# Altium PCB WiirdFlex Top.PcbDoc
Units mm, origin at the board's own origin, x right, y up, seen from the top; angles counter-clockwise.
Board outline 74.45 x 75.37 mm, 2 copper layers (Top Layer, Bottom Layer), stack 0.143 mm thick; 13 components, 23 nets, 114 pads, 92 vias.
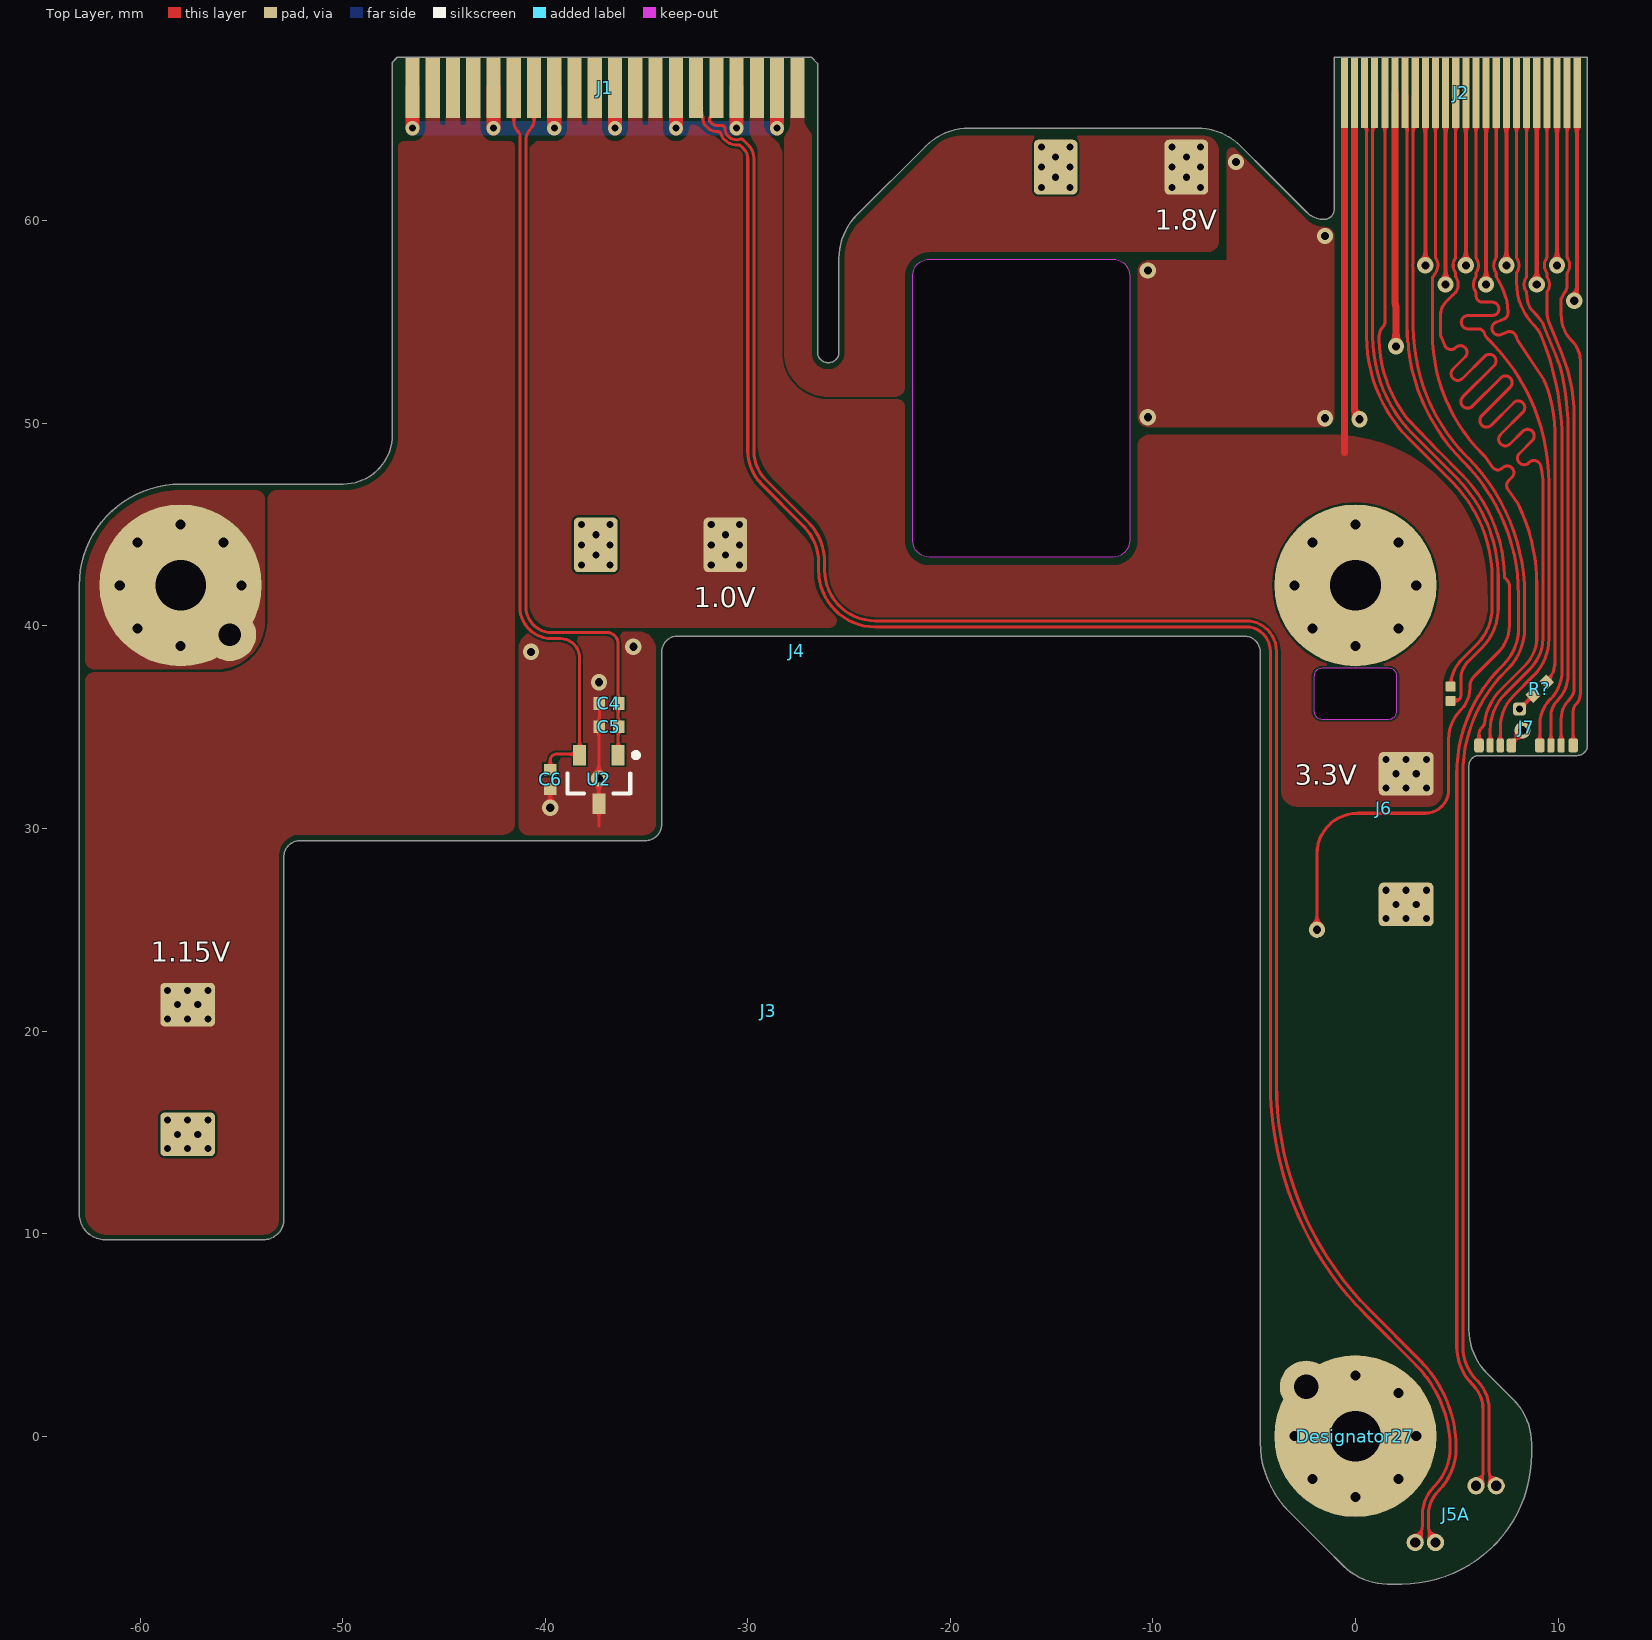
[diagram p0: Top Layer view]
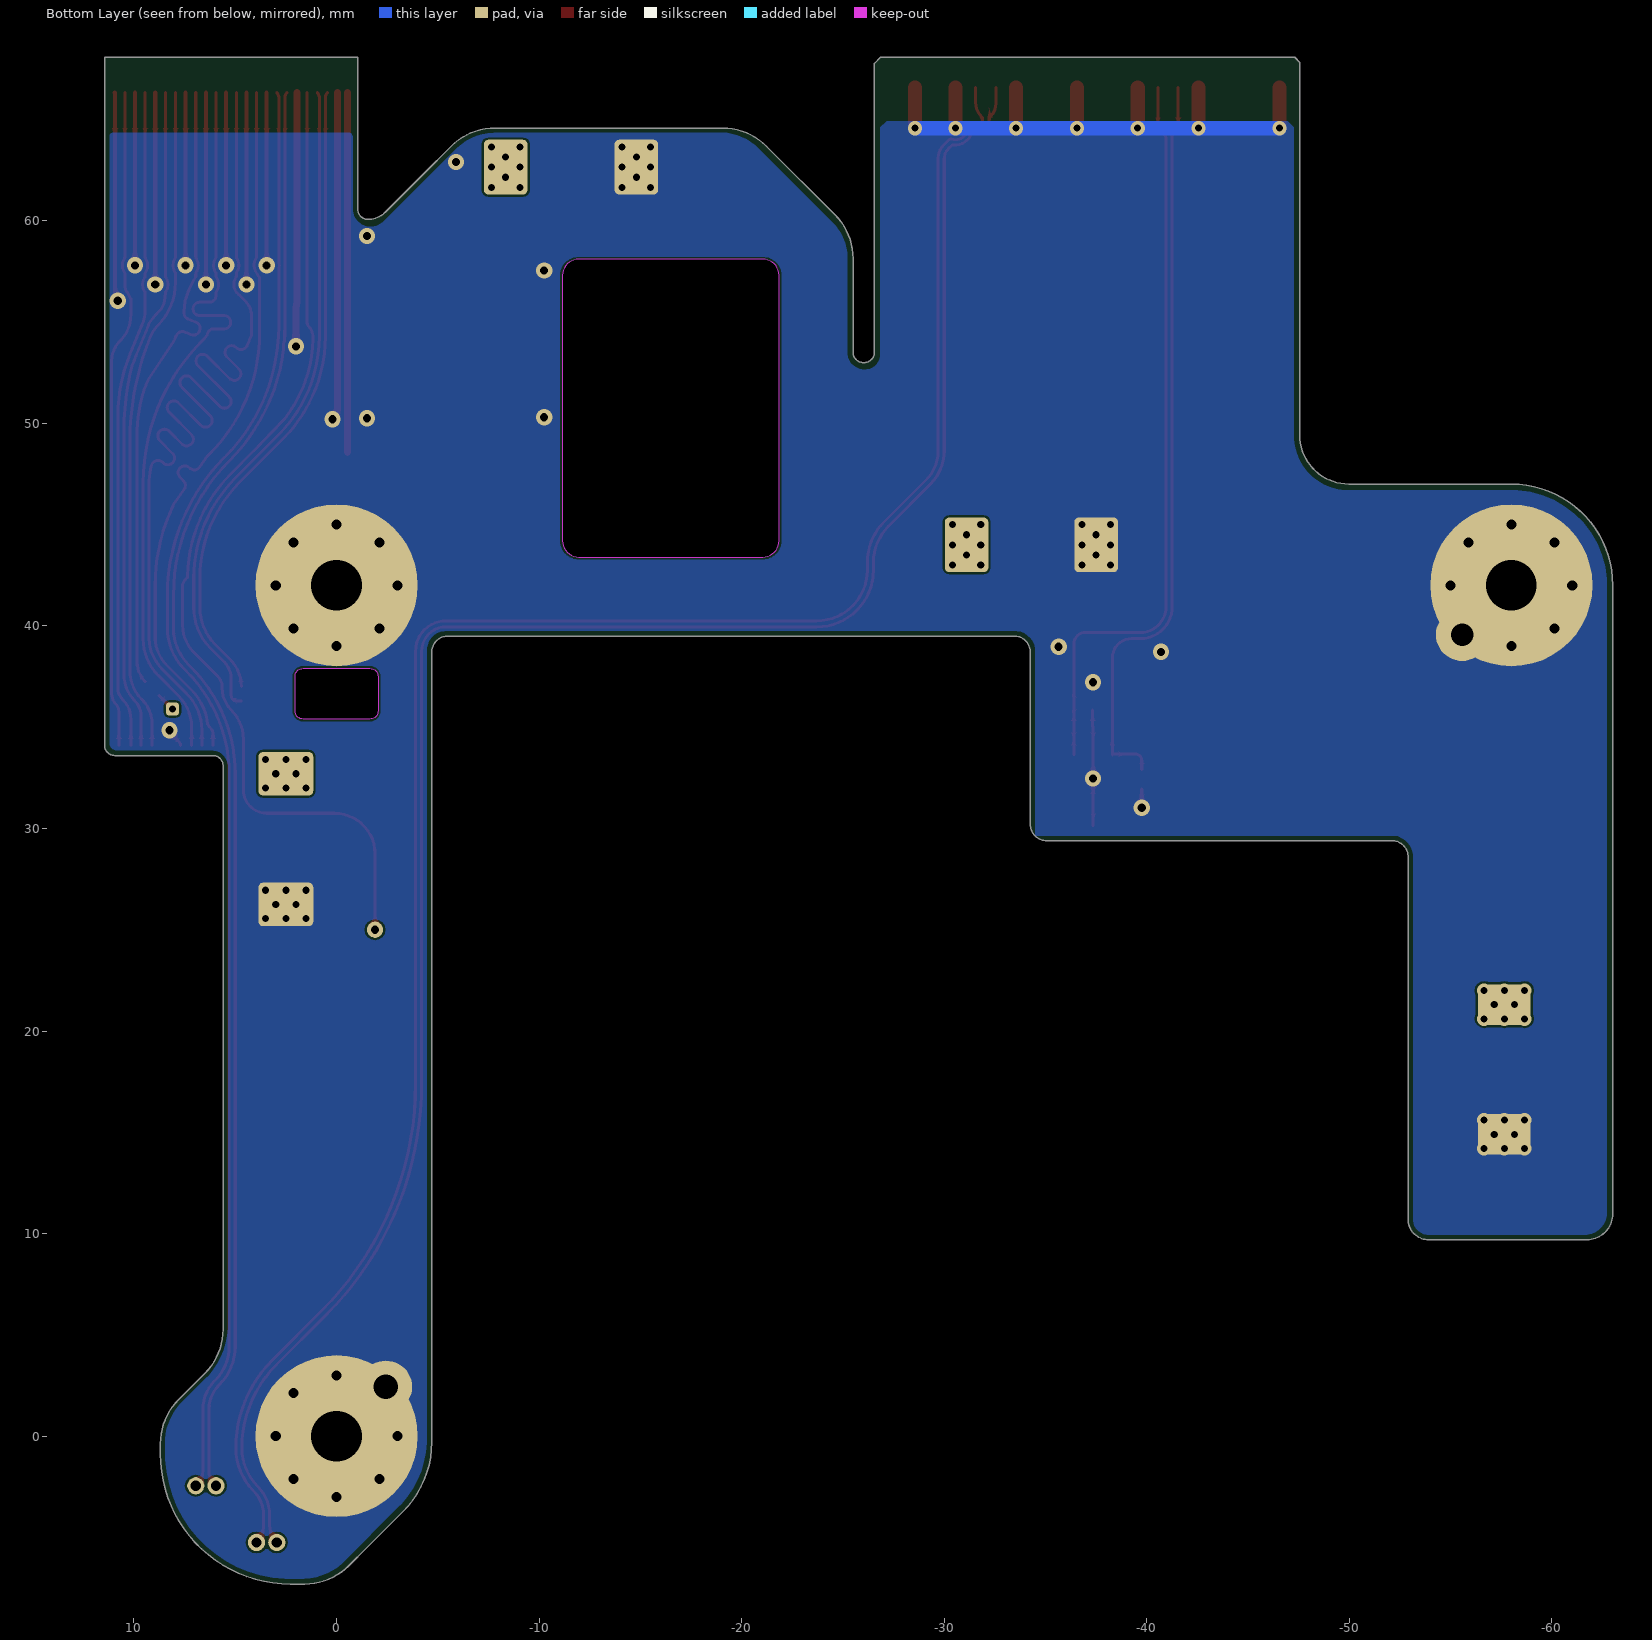
[diagram p1: Bottom Layer view, seen from below]

## Layer stack, top to bottom
Top Coverlay: solder mask 0.0275, SM-001, Dk 4.2
Top Layer: signal copper 0.0525
Dielectric 2: prepreg 0.013, Adhesive, Dk 4.1
Dielectric 1: core 0.0125, Polyimide, Dk 3.2
Dielectric 3: prepreg 0.013, Adhesive, Dk 4.1
Bottom Layer: signal copper 0.0525
Bottom Coverlay: solder mask 0.0275, SM-001, Dk 4.2

## Board outline
-61.73,9.7 cw(c-61.73,10.97) -63,10.97 -63,42 cw(c-58,42) -58,47 -49.975,47 ccw(c-49.975,49.425) -47.55,49.425 -47.55,67.8 -47.55,67.82 -47.3,68.07 -26.85,68.07 -26.55,67.77 -26.55,53.5 ccw(c-26.05,53.5) -26.05,53 -26,53 ccw(c-26,53.5) -25.5,53.5 -25.5,58.13 cw(c-22.434,58.13) -24.602,60.298 -21.228,63.672 cw(c-19.06,61.504) -19.06,64.57 -7.82,64.57 cw(c-7.82,61.504) -5.652,63.672 -4.3,62.32 -2.404,60.424 ccw(c-1.55,61.277) -1.55,60.07 ccw(c-1.55,60.57) -1.05,60.57 -1.05,68.07 11.45,68.07 11.45,34.1 cw(c10.95,34.1) 10.95,33.6 6.1,33.6 ccw(c6.1,33.1) 5.6,33.1 5.6,5.27 ccw(c8.666,5.27) 6.498,3.102 7.802,1.798 cw(c5.634,-0.37) 8.7,-0.37 8.7,-0.875 cw(c2.275,-0.875) 2.275,-7.3 1.57,-7.3 cw(c1.57,-4.234) -0.598,-6.402 -1.502,-5.498 -3.277,-3.723 cw(c0.158,-0.288) -4.7,-0.288 -4.7,38.7 ccw(c-5.5,38.7) -5.5,39.5 -33.45,39.5 ccw(c-33.45,38.7) -34.25,38.7 -34.25,30.2 cw(c-35.05,30.2) -35.05,29.4 -52.1,29.4 ccw(c-52.1,28.6) -52.9,28.6 -52.9,10.7 cw(c-53.9,10.7) -53.9,9.7
cut-out: 1.65,37.9 -1.65,37.9 ccw(c-1.65,37.5) -2.05,37.5 -2.05,35.8 ccw(c-1.65,35.8) -1.65,35.4 1.65,35.4 ccw(c1.65,35.8) 2.05,35.8 2.05,37.5 ccw(c1.65,37.5)
cut-out: -21.05,58.1 -11.95,58.1 cw(c-11.95,57.3) -11.15,57.3 -11.15,44.2 cw(c-11.95,44.2) -11.95,43.4 -21.05,43.4 cw(c-21.05,44.2) -21.85,44.2 -21.85,57.3 cw(c-21.05,57.3)

## Design rules (kind name [scope] priority, off if disabled: settings)
Clearance [All] p1: gap=0.1 ignorepadtopadclearanceinfootprint=FALSE
DiffPairsRouting DiffPairsRouting_USB1 [InDifferentialPairClass('USB')] p1: maxlimit=0.254 minlimit=0.101 mostfreqgap=0.15 toplayer_minwidth=0.06 toplayer_maxwidth=0.381 toplayer_prefwidth=0.15 bottomlayer_minwidth=0.06 bottomlayer_maxwidth=0.381 bottomlayer_prefwidth=0.15 impedanceprofiledriven=TRUE impedanceprofileid={1371FDB5-D5BD-4BD9-98B9-99D2D47B4C02} impedanceprofilevalue=90.000000 maxuncoupledlength=12.7
DiffPairsRouting [All] p2: maxlimit=0.254 minlimit=0.254 mostfreqgap=0.254 toplayer_minwidth=0.381 toplayer_maxwidth=0.381 toplayer_prefwidth=0.381 bottomlayer_minwidth=0.381 bottomlayer_maxwidth=0.381 bottomlayer_prefwidth=0.381 maxuncoupledlength=12.7
PolygonConnect [All] p1: connectstyle=Direct reliefconductorwidth=0.254 reliefentries=4 polygonreliefangle="90 Angle" airgapwidth=0.254
RoutingVias [All] p1: holewidth=0.4 width=0.8 viastyle="Through Hole" minholewidth=0.4 minwidth=0.8 maxholewidth=0.711 maxwidth=1.27
SolderMaskExpansion TentedVias [IsVia] p1: expansion=0.102 istentingtop=TRUE
SolderMaskExpansion [All] p2: expansion=0.102 istentingtop=FALSE
Width [All] p1: maxlimit=10 minlimit=0.15 preferedwidth=0.15
29 further rules are at their usual default settings.

## Classes and differential pairs
component class TempSense: C4 C5 C6 U2
differential pair class USB: USB_BT USB_D1 USB_D2
component class "WiirdFlex Top": J1 J2 J3 J4 J5A J6 J7 R?
differential pair USB_D2: +USB_D2_P -USB_D2_N
differential pair USB_BT: +USB_BT_P -USB_BT_N
differential pair USB_D1: +USB_D1_P -USB_D1_N

## Components (designator, comment, footprint, x,y, rotation, side; value= is the part's Value field where it differs from the comment)
C4 "Capacitor" CAPC1005X06N -36.85,36.17 r0 top value=1uF
C5 "Capacitor" CAPC1005X06N -36.85,35.02 r0 top value=0.1uF
C6 "Capacitor" CAPC1005X06N -39.75,32.42 r90 top value=0.1uF
Designator27 "Comment" "Wii Trim: LMAO with extra mounting hole" 0,0 r0 top locked
J1 "WiirdFlex Power and USB" "2-1734248-0 FPC tab" -37.05,68.07 r0 top
J2 "WiirdFlex Top Extra Signals" "FH12A-24S-0.5SH(55) FPC TAB" -1.05,66.32 r0 top
J3 "RVK-1_Ground_MountingScrews" "RVK-1_GND_SCREWS - LMAO WITH EXTRA SCREWPOST" 0,0 r0 top locked
J4 "RVK-1_Power_Rails" RVK-1_Power_Rails_Top_Direct 0,0 r0 top locked
J5A "RVK-1_USB_Both" RVK-1_USB_TOP 0,0 r0 top locked
J6 "RVK-01_Bluetooth_Data" RVK-1_BT_DATA 0,0 r0 top locked
J7 "RVK-1_SD_Bus" RVK-1_SD_RPADS_TOP_FLEX 0,0 r0 top locked
R? "Resistor" RESC1005X04N 9.108,36.908 r225 top value=30?
U2 "MCP9700T-E/TT" SOT95P237X112-3N -37.35,32.42 r270 top

## Footprints (in the part's own frame and the unit in brackets; to place one, negate y for a bottom-side part, rotate by r counter-clockwise, add the part's x,y. Pads: shape width x height; smd on the part's side, far side on the other; paste and mask are expansions set on the pad)
"2-1734248-0 FPC tab" [mm] "FPC tab to mate with TE Connectivity 2-1734248-0"
  rect 0.7x3 smd: 1(9.5,-1.5) 2(8.5,-1.5) 3(7.5,-1.5) 4(6.5,-1.5) 5(5.5,-1.5) 6(4.5,-1.5) 7(3.5,-1.5) 8(2.5,-1.5) 9(1.5,-1.5) 10(0.5,-1.5) 11(-0.5,-1.5) 12(-1.5,-1.5) 13(-2.5,-1.5) 14(-3.5,-1.5) 15(-4.5,-1.5) 16(-5.5,-1.5) 17(-6.5,-1.5) 18(-7.5,-1.5) 19(-8.5,-1.5) 20(-9.5,-1.5)
CAPC1005X06N [mm] "Chip Capacitor, 2-Leads, Body 1.00x0.50mm, IPC Medium Density"
  rect 0.58x0.62 smd: 1(-0.48,0) 2(0.48,0)
  body extent -0.52,-0.27 0.53,0.28, height 0.55
"FH12A-24S-0.5SH(55) FPC TAB" [mm]
  rect 0.35x3.5 smd mask+0: 1(0.5,0) 2(1,0) 3(1.5,0) 4(2,0) 5(2.5,0) 6(3,0) 7(3.5,0) 8(4,0) 9(4.5,0) 10(5,0) 11(5.5,0) 12(6,0) 13(6.5,0) 14(7,0) 15(7.5,0) 16(8,0) 17(8.5,0) 18(9,0) 19(9.5,0) 20(10,0) 21(10.5,0) 22(11,0) 23(11.5,0) 24(12,0)
RESC1005X04N [mm] "Chip Resistor, 2-Leads, Body 1.00x0.50mm, IPC Medium Density"
  rect 0.5x0.55 smd: 1(-0.475,0) 2(0.475,0)
  body extent -0.52,-0.27 0.53,0.28, height 0.4
RVK-1_BT_DATA [mm]
  rrect20% 0.5x0.5 smd: 1(4.7,36.3) 2(4.7,37)
  round 0.8 hole 0.4: 3(-1.9,25)
"RVK-1_GND_SCREWS - LMAO WITH EXTRA SCREWPOST" [mm]
  round 1 hole 0.5: 1(-61,42) 1(-60.121,39.879) 1(-60.121,44.121) 1(-58,39) 1(-58,45) 1(-55.879,44.121) 1(-55,42) 1(-3,0) 1(-3,42) 1(-2.121,-2.121) 1(-2.121,39.879) 1(-2.121,44.121) 1(0,-3) 1(0,3) 1(0,39) 1(0,45) 1(2.121,-2.121) 1(2.121,2.121) 1(2.121,39.879) 1(2.121,44.121) 1(3,0) 1(3,42)
  round 8 hole 2.5: 1(-58,42) 1(0,0) 1(0,42)
  round 2.6 hole 1.1: 1(-55.568,39.568)
  round 2.6 hole 1.2: 1(-2.432,2.432)
RVK-1_Power_Rails_Top_Direct [mm] "Direct solder-to-board attachment options for Wii power rails.  Includes pads to attach to the Wii in place of existing bulk capacitors (those capacitors would then be relocated to the interface board"
  rrect50% 2.6x2 smd far side: 1(-57.65,14.9) 3(-57.65,21.3)
  rrect20% 2.7x2.15 smd: 1(-57.65,14.9) 1(2.5,26.25) 3(-57.65,21.3) 5(2.5,32.7)
  rrect20% 2.15x2.7 smd far side: 1(-37.5,44) 1(-14.8,62.65) 2(-31.1,44) 4(-8.35,62.65)
  rrect20% 2.15x2.7 smd: 1(-37.5,44) 1(-14.8,62.65) 2(-31.1,44) 4(-8.35,62.65)
  rrect20% 2.7x2.15 smd far side: 1(2.5,26.25) 5(2.5,32.7)
RVK-1_SD_RPADS_TOP_FLEX [mm] "Interface to SD lines as used in top flex"
  rrect50% 0.475x0.7 smd mask-1: 1(6.1,34.1) 5(9.1,34.1) 8(10.75,34.1) 9(7.7,34.1)
  rrect50% 0.35x0.7 smd mask-1: 2(6.65,34.1) 3(7.15,34.1) 6(9.65,34.1) 7(10.15,34.1)
  rrect50% 0.65x0.65 hole 0.35: 4(8.1,35.9)
RVK-1_USB_TOP [mm] "USB vias, the easiest way to access USB from the top side.  This is upstream of ESD protection."
  round 0.85 hole 0.5: 1(3.95,-5.25) 2(2.95,-5.25) 3(5.95,-2.45) 4(6.95,-2.45)
SOT95P237X112-3N [mm] "SOT23, 3-Leads, Body 2.86x2.37mm, Pitch 0.95mm, IPC Medium Density"
  rect 1x0.65 smd: 1(-1.2,0.95) 2(-1.2,-0.95) 3(1.2,0)
  silkscreen extent -1.32,-1.55 0.7,1.95, body extent -0.7,-1.52 0.7,1.53, height 1.12
"Wii Trim: LMAO with extra mounting hole" [mm] "LMAO trim outline, from jefflongo's worklog at https://bitbuilt.net/forums/index.php?threads/wii-pocket.2709/"

## Part data
C4 C5 C6: "General purpose capacitor", Package=0402, Rated Voltage=6.3V
J1: "FPC tab connector for power, main USB, and thermistor/temp sensor"
J2: "FPC tab connector for extra signals: USB, BT, SD"
J4: "Connection points for Wii power rails"
R?: "General purpose resistor", Package=0402
U2: "Low-Power Linear Active Thermistor IC, SOT-23-3 package"

## Via types
v1: diameter 0.7, hole 0.35, Top Layer to Bottom Layer, tented both sides, 71 vias
v2: diameter 0.8, hole 0.4, Top Layer to Bottom Layer, tented both sides, 21 vias

## Nets (pads, with @x,y where several pads share a name; then routed paths per layer and width w, separated by ;. In a path a pad name is that pad's centre, name@x,y a point inside that pad or via, vN(x,y) a via of type N, cw(c..) or ccw(c..) an arc to the next point about the centre after c; other vN are vias at no path point)
1.0V: J1.8 J1.9 J1.11 J1.12 J4.2
  other v1: -31.8,43 -30.4,43 -31.1,43.5 -31.8,44 -30.4,44 -31.1,44.5 -31.8,45 -30.4,45
1.8V: J1.1 J4.4
  other v1: -9.05,61.65 -7.65,61.65 -8.35,62.15 -9.05,62.65 -7.65,62.65 -8.35,63.15 -9.05,63.65 -7.65,63.65
1.15V: J1.17 J1.18 J1.19 J4.3
  other v1: -58.65,20.6 -57.65,20.6 -56.65,20.6 -58.15,21.3 -57.15,21.3 -58.65,22 -57.65,22 -56.65,22
3.3V: J1.3 J2.1 J4.5 | length 17.8
  Top Layer w0.35: -0.55,48.57 J2.1
  other v1: 1.5,32 2.5,32 3.5,32 2,32.7 3,32.7 1.5,33.4 2.5,33.4 3.5,33.4
BT_SENSE: J2.5 J6.3 | length 49.6
  Top Layer w0.15: J6.3 -1.9,28.75 cw(c0.1,28.75) 0.1,30.75 3.45,30.75 ccw(c3.45,31.9) 4.6,31.9 4.6,34.401 cw(c6.649,34.401) 5.2,35.85 ccw(c4.114,36.936) 5.65,36.936 5.65,37 cw(c6.374,37) 5.862,37.512 7.05,38.7 ccw(c5.722,40.028) 7.6,40.028 7.6,41.938 ccw(c7.088,41.938) 7.45,42.3 cw(c8.24,43.09) 7.384,42.372 ; J2.5 1.45,54.991 cw(c1.109,54.991) 1.35,54.75 ccw(c1.775,54.325) 1.174,54.325 1.174,54.163 ccw(c7.612,54.222) 2.588,50.195 4.118,48.606 ccw(c4.226,48.71) 4.12,48.604 5.203,47.521 cw(c0.024,42.34) 6.877,44.929 6.878,44.927 cw(c0.224,42.377) 7.349,42.467 ccw(c7.499,42.468) 7.384,42.373
GND: C4.1 C5.1 C6.1 J1.2 J1.4 J1.7 J1.10 J1.13 J1.16 J1.20 J2.2 J2.6 J2.9 J2.11 J2.13 J2.15 J2.17 J2.20 J2.22 J2.24 J3.1 J4.1 J7.9 U2.3 | length 141.1
  Top Layer w0.15: v2(-39.75,31.02) C6.1 ; -37.35,30.12 U2.3 v2(-37.35,32.47) -37.35,35 C5.1 -37.33,35.851 ; J7.9 cw(c7.941,34.1) 7.771,34.271 8.25,34.75 v2(8.25,34.85)
  Top Layer w0.2: v2(3.45,57.8) J2.9 ; v2(4.45,56.85) J2.11 ; v2(5.45,57.8) J2.13 ; v2(6.45,56.85) J2.15 ; v2(7.45,57.8) J2.17 ; v2(8.95,56.85) J2.20 ; v2(9.95,57.8) J2.22 ; v2(10.8,56.05) ccw(c10.612,56.117) 10.812,56.118 10.812,56.147 cw(c11.012,56.147) 10.817,56.195 10.829,56.242 10.926,56.637 ccw(c10.732,56.686) 10.932,56.687 10.932,66.238 cw(c11.132,66.238) 10.946,66.31 J2.24
  Top Layer w0.35: J2.2 -0.05,50.804 ccw(c0.804,50.804) v2(0.2,50.2) ; J2.6 1.95,56.152 1.95,56.022 1.95,56.02 ccw(c2.3,56.022) 1.955,55.965 1.995,55.719 cw(c1.65,55.661) 2,55.661 v2(2,53.8)
  Top Layer w0.7: v1(-46.55,64.57) J1.20 ; v1(-42.55,64.57) J1.16 ; v1(-39.55,64.57) J1.13 ; v1(-36.55,64.57) J1.10 ; v1(-33.55,64.57) J1.7 ; v1(-30.55,64.57) J1.4 ; v1(-28.55,64.57) J1.2
  Bottom Layer w0.7: v1(-46.55,64.57) v1(-42.55,64.57) v1(-39.55,64.57) v1(-36.55,64.57) v1(-33.55,64.57) v1(-30.55,64.57) v1(-28.55,64.57)
  other v1: -58.65,14.2 -57.65,14.2 -56.65,14.2 -58.15,14.9 -57.15,14.9 -58.65,15.6 -57.65,15.6 -56.65,15.6 1.5,25.55 2.5,25.55 3.5,25.55 2,26.25 3,26.25 1.5,26.95 2.5,26.95 3.5,26.95 -38.2,43 -36.8,43 -37.5,43.5 -38.2,44 -36.8,44 -37.5,44.5 -38.2,45 -36.8,45 -15.5,61.65 -14.1,61.65 -14.8,62.15 -15.5,62.65 -14.1,62.65 -14.8,63.15 -15.5,63.65 -14.1,63.65
  other v2: -37.35,37.22 -40.7,38.72 -35.65,38.97 -1.5,50.25 -10.25,50.3 -10.25,57.55 -1.5,59.25 -5.9,62.9
SD_CD: J2.19 J7.6 | length 33
  Top Layer w0.15: J2.19 8.45,57.273 cw(c8.3,57.272) 8.426,57.19 ccw(c8.95,56.85) 8.426,56.51 cw(c8.3,56.428) 8.45,56.427 ccw(c10.051,56.427) 8.63,55.69 ccw(c8.763,55.759) 8.632,55.686 8.638,55.675 ccw(c9.873,56.668) 8.75,55.55 cw(c5.825,52.63) 9.252,54.94 ccw(c11.433,55.616) 9.321,54.75 9.913,53.31 cw(c2.693,50.339) 10.091,52.831 10.093,52.826 cw(c-2.126,49.645) 10.5,49.649 10.5,49.647 10.5,37.609 cw(c8.642,37.609) 9.956,36.295 cw(c8.151,37.799) 9.839,36.166 ccw(c9.947,36.061) 9.823,36.146 ccw(c10.674,35.576) 9.65,35.576 J7.6
SD_CLK: J2.16 R?.1 | length 31.4
  Top Layer w0.15: J2.16 6.95,58.223 cw(c6.8,58.222) 6.926,58.14 ccw(c7.45,57.8) 6.902,57.5 ccw(c7.45,57.8) 6.926,57.46 cw(c6.8,57.378) 6.95,57.377 6.95,57.272 ccw(c7.1,57.272) 6.974,57.19 cw(c3.836,55.153) 7.34,56.465 cw(c3.836,55.153) 7.341,56.462 cw(c3.836,55.153) 7.436,56.172 cw(c3.836,55.153) 7.456,56.099 7.472,56.037 7.537,55.498 cw(c7.21,55.459) 7.336,55.155 6.94,54.99 ccw(c7.066,54.686) 6.762,54.56 ccw(c7.066,54.686) 7.192,54.383 7.487,54.505 cw(c7.613,54.201) 7.917,54.325 8.015,54.085 9.314,52.128 9.315,52.126 9.399,51.915 cw(c2.812,49.435) 9.425,51.844 cw(c2.812,49.435) 9.471,51.713 cw(c2.812,49.435) 9.848,49.6 cw(c2.812,49.435) 9.85,49.436 9.85,49.435 9.85,38.225 cw(c8.462,38.225) R?.1
SD_CLK_UNTERM: J7.4 R?.2 | length 0.9
  Top Layer w0.15: J7.4 R?.2
SD_CMD: J2.10 J7.1 | length 35.6
  Top Layer w0.15: 3.8,54.456 ccw(c12.265,54.456) 6.277,48.473 6.279,48.471 cw(c-0.167,42.023) 6.376,48.372 cw(c-0.167,42.023) 6.428,48.318 6.758,47.844 ccw(c7.028,48.031) 7.261,47.799 cw(c7.494,47.566) 7.726,47.799 cw(c7.494,47.566) 7.726,47.333 7.559,47.166 ccw(c7.791,46.933) 7.521,46.746 8.032,46.011 cw(c-0.167,42.023) 8.066,45.939 cw(c-0.167,42.023) 8.68,44.227 cw(c-0.167,42.023) 8.95,42.025 8.95,42.023 8.95,39.352 cw(c7.01,39.352) 8.918,39.002 cw(c6.76,39.602) 8.344,38.018 7.183,36.857 ccw(c9.19,34.848) 6.427,35.505 ccw(c9.19,34.848) 6.37,35.186 cw(c6.221,35.204) 6.349,35.125 cw(c5.767,35.483) 6.25,35 ccw(c6.612,34.638) 6.1,34.638 J7.1 ; 3.8,54.458 3.8,57.2 ccw(c3.438,57.562) 3.911,57.367 cw(c4.05,57.309) 3.934,57.404 ccw(c3.45,57.8) 3.974,58.14 cw(c4.1,58.222) 3.95,58.222 J2.10
SD_DAT0: J2.23 J7.8 | length 32.7
  Top Layer w0.15: 10.45,57.378 10.45,56.874 cw(c9.426,56.874) 10.399,56.556 cw(c10.257,56.603) 10.362,56.496 ccw(c10.8,56.05) 10.2,56.227 cw(c10.057,56.269) 10.164,56.165 cw(c9.426,56.874) 10.15,56.15 10.15,55.378 ccw(c12.028,55.378) 10.7,54.05 cw(c9.734,53.084) 11.1,53.084 11.1,36.633 cw(c10.417,36.633) 10.9,36.15 ccw(c11.262,35.788) 10.75,35.788 J7.8 ; 10.45,57.378 cw(c10.6,57.378) 10.474,57.46 ccw(c9.95,57.8) 10.474,58.14 cw(c10.6,58.222) 10.45,58.222 J2.23
SD_DAT1: J2.21 J7.7 | length 32.7
  Top Layer w0.15: 9.45,55.616 ccw(c11.433,55.616) 9.599,54.862 10.191,53.422 cw(c2.693,50.339) 10.8,50.342 10.8,50.34 10.8,36.954 cw(c9.946,36.954) 10.55,36.35 ccw(c11.516,35.384) 10.15,35.384 ; 9.45,55.617 9.45,56.428 cw(c9.6,56.428) 9.474,56.51 ccw(c8.95,56.85) 9.474,57.19 cw(c9.6,57.272) 9.45,57.272 9.45,57.377 ccw(c9.3,57.378) 9.426,57.46 cw(c9.95,57.8) 9.426,58.14 ccw(c9.3,58.222) 9.45,58.223 J2.21 ; J7.7 10.15,35.383
SD_DAT2: J2.14 J7.3 | length 37.3
  Top Layer w0.15: J2.14 5.95,58.222 ccw(c6.1,58.222) 5.974,58.14 cw(c5.45,57.8) 5.974,57.46 ccw(c6.1,57.378) 5.95,57.378 5.95,57.273 cw(c5.8,57.272) 5.926,57.19 ccw(c6.45,56.85) 5.838,56.723 ccw(c6.45,56.85) 5.859,56.648 5.926,56.51 5.95,56.427 5.95,56.307 ccw(c6.279,56.307) 6.279,55.978 6.757,55.978 cw(c6.757,55.649) 7.086,55.649 cw(c6.757,55.649) 6.757,55.32 5.552,55.32 ccw(c5.552,54.991) 5.223,54.991 ccw(c5.552,54.991) 5.552,54.662 6.062,54.662 cw(c6.062,54.333) 6.375,54.435 6.408,54.333 ccw(c8.348,55.743) 6.465,54.258 ccw(c8.348,55.743) 6.652,54.048 cw(c-0.347,47.05) 6.897,53.794 cw(c-0.347,47.05) 7.524,53.05 cw(c-0.347,47.05) 7.529,53.044 cw(c-0.347,47.05) 7.807,52.66 cw(c-0.347,47.05) 9.55,47.052 9.55,47.05 9.55,39.352 cw(c7.01,39.352) 8.806,37.556 7.8,36.55 ccw(c9.369,34.981) 7.15,34.981 J7.3
SD_DAT3: J2.12 J7.2 | length 52.7
  Top Layer w0.15: J2.12 4.95,58.223 cw(c4.8,58.222) 4.926,58.14 ccw(c5.45,57.8) 4.926,57.46 cw(c4.8,57.378) 4.95,57.377 4.95,57.272 ccw(c5.1,57.272) 4.974,57.19 cw(c4.45,56.85) 4.974,56.51 cw(c4.45,56.85) 4.802,56.333 ccw(c4.886,56.209) 4.78,56.315 4.508,56.043 4.473,56.008 ccw(c5.131,55.35) 4.2,55.35 4.2,54.7 4.2,54.352 4.409,53.846 ccw(c4.713,53.972) 4.946,53.74 cw(c5.179,53.507) 5.411,53.74 cw(c5.179,53.507) 5.411,53.274 4.818,52.682 ccw(c5.051,52.449) 4.818,52.216 ccw(c5.051,52.449) 5.284,52.216 6.379,53.312 cw(c6.612,53.079) 6.845,53.312 cw(c6.612,53.079) 6.845,52.847 5.304,51.306 ccw(c5.536,51.073) 5.304,50.841 ccw(c5.536,51.073) 5.769,50.841 7.171,52.242 cw(c7.404,52.01) 7.636,52.242 cw(c7.404,52.01) 7.636,51.777 6.234,50.375 ccw(c6.467,50.143) 6.234,49.91 ccw(c6.467,50.143) 6.7,49.91 7.798,51.008 cw(c8.031,50.776) 8.263,51.008 cw(c8.031,50.776) 8.263,50.543 7.165,49.445 ccw(c7.398,49.212) 7.165,48.979 ccw(c7.398,49.212) 7.63,48.979 8.264,49.613 cw(c8.497,49.38) 8.729,49.613 cw(c8.497,49.38) 8.729,49.148 8.096,48.514 ccw(c8.328,48.282) 8.096,48.049 ccw(c8.328,48.282) 8.561,48.049 8.582,48.07 cw(c8.815,47.838) 9.097,48.006 9.142,47.932 cw(c6.71,47.198) 9.165,47.849 cw(c6.71,47.198) 9.245,47.354 cw(c-0.347,47.05) 9.25,47.057 9.25,45.782 9.25,45.78 9.25,39.352 cw(c7.01,39.352) 9.211,38.935 ; J7.2 6.65,34.848 cw(c9.19,34.848) 7.394,36.644 8.556,37.806 ccw(c6.76,39.602) 9.211,38.935
SD_WP: J2.18 J7.5 | length 33
  Top Layer w0.15: 7.95,56.972 ccw(c11.021,56.972) 8.845,54.805 cw(c7.794,53.749) 9.171,54.318 cw(c-3.372,49.134) 10.2,49.14 10.2,49.138 10.2,37.799 cw(c8.151,37.799) 9.6,36.35 ccw(c10.807,35.143) 9.1,35.143 J7.5 ; 7.95,56.973 7.95,57.378 cw(c8.1,57.378) 7.974,57.46 ccw(c7.45,57.8) 7.974,58.14 cw(c8.1,58.222) 7.95,58.222 J2.18
TempSense1: C4.2 C5.2 J1.14 U2.1 | length 38.1
  Top Layer w0.15: -40.95,59.675 -40.95,63.97 cw(c-40.155,63.97) -40.89,64.273 -40.889,64.275 cw(c-39.968,63.893) -40.699,64.571 ccw(c-41.109,64.951) -40.55,64.95 -40.55,64.952 J1.14 ; -40.95,60.925 -40.95,40.94 ccw(c-39.68,40.94) -39.68,39.67 -36.95,39.67 cw(c-36.95,39.12) -36.4,39.12 -36.4,36.17 -36.4,35.02 U2.1
TempSense2: C6.2 J1.15 U2.2 | length 38.2
  Top Layer w0.15: J1.15 -41.55,64.903 ccw(c-40.867,64.903) -41.351,64.421 cw(c-41.595,64.177) -41.25,64.177 -41.25,64.082 ; -41.25,59.675 -41.25,64.129 ; -41.25,60.925 -41.25,40.92 ccw(c-39.85,40.92) -41.21,40.59 ccw(c-39.68,40.94) -39.68,39.37 -39.25,39.37 cw(c-39.25,38.42) -38.3,38.42 U2.2 ; C6.2 -39.75,33.37 cw(c-39.45,33.37) -39.45,33.67 U2.2@-38.35,33.67
USB_BT_N: J2.4 J6.1 | length 33
  Top Layer w0.15: 0.85,54.287 ccw(c7.698,54.287) 2.854,49.446 4.991,47.309 cw(c0.024,42.34) 7.05,42.34 ; 0.85,54.288 0.85,66.079 cw(c1.191,66.079) J2.4 ; J6.1 4.95,36.3 ccw(c4.95,36.55) 5.2,36.55 5.2,37.376 cw(c6.405,37.376) 5.553,38.229 6.221,38.897 ccw(c4.219,40.898) 7.05,40.898 7.05,42.339
USB_BT_P: J2.3 J6.2 | length 32
  Top Layer w0.15: J2.3 cw(c0.209,66.079) 0.55,66.079 0.55,54.286 ; 0.55,54.285 ccw(c7.694,54.285) 2.641,49.235 4.776,47.1 cw(c0.012,42.335) 6.75,42.335 ; J6.2 cw(c6.631,37) 5.266,38.366 6.006,39.106 ccw(c4.21,40.902) 6.75,40.902 6.75,42.334
USB_D1_N: J1.5 J5A.1 | length 98.3
  Top Layer w0.15: J1.5 -31.55,65.846 cw(c-32.579,65.846) -31.852,65.118 ccw(c-31.734,65.001) -31.852,64.884 -31.781,64.814 ccw(c-31.494,65.101) -31.494,64.695 -31.275,64.695 cw(c-31.275,64.545) -31.125,64.55 ccw(c-30.55,64.57) -30.347,64.032 -30.32,64.031 cw(c-30.325,63.881) -30.218,63.987 -30.148,63.917 cw(c-30.466,63.598) -30.146,63.915 -30.043,63.811 -29.975,63.743 cw(c-30.638,63.08) -29.7,63.08 -29.7,48.649 ccw(c-27.651,48.649) -29.1,47.2 -27.028,45.128 cw(c-29.028,43.129) -26.2,43.129 -26.2,42.74 ccw(c-23.71,42.74) -23.71,40.25 -5.4,40.25 cw(c-5.4,38.75) -3.9,38.75 -3.9,17.399 ccw(c11.974,17.399) 0.749,6.175 3.176,3.749 cw(c-1.165,-0.592) 4.974,-0.592 cw(c1.993,-0.592) 4.1,-2.7 ccw(c5.307,-3.907) 3.6,-3.907 3.6,-4.405 ccw(c4.583,-4.405) 3.888,-5.1 cw(c3.738,-5.25) J5A.1
USB_D1_P: J1.6 J5A.2 | length 98.2
  Top Layer w0.15: J1.6 -32.55,65.784 ccw(c-31.671,65.784) -32.292,65.162 cw(c-32.516,64.939) -32.2,64.939 ccw(c-31.884,64.939) -32.108,64.716 -31.992,64.6 ccw(c-31.496,65.096) -31.496,64.395 -31.419,64.395 ; -31.418,64.395 cw(c-31.474,64.256) -31.332,64.304 ccw(c-30.55,64.57) -30.478,63.747 cw(c-30.466,63.598) -30.359,63.703 cw(c-30.464,63.596) -30.358,63.702 -30.254,63.598 -30.188,63.532 cw(c-30.641,63.079) -30,63.079 -30,48.646 ccw(c-27.656,48.646) -29.314,46.989 -27.244,44.92 cw(c-29.04,43.124) -26.5,43.124 -26.5,42.74 ccw(c-23.71,42.74) -23.71,39.95 -5.4,39.95 cw(c-5.4,38.75) -4.2,38.75 -4.2,17.398 ccw(c11.97,17.398) 0.536,5.964 2.96,3.54 cw(c-1.174,-0.594) 4.672,-0.594 cw(c1.993,-0.594) 3.888,-2.488 ccw(c5.306,-3.907) 3.3,-3.907 3.3,-4.405 cw(c2.317,-4.405) 3.012,-5.1 ccw(c3.162,-5.25) J5A.2
USB_D2_N: J2.7 J5A.3 | length 71.6
  Top Layer w0.15: J2.7 cw(c2.209,66.079) 2.55,66.079 2.55,54.798 ; 2.55,54.797 ccw(c12.017,54.797) 2.579,54.051 ; 2.579,54.05 2.581,54.03 cw(c2,53.8) 2.623,53.748 2.617,53.675 ccw(c2.767,53.686) 2.618,53.668 ccw(c11.966,54.791) 5.308,48.133 cw(c-1.308,41.515) 8.05,41.516 8.05,41.514 8.05,39.876 cw(c5.51,39.876) 7.306,38.08 7.19,37.964 ccw(c12.477,32.677) 5,32.677 5,4.438 ccw(c7.685,4.438) 5.786,2.539 5.788,2.538 cw(c4.551,1.301) 6.3,1.301 6.3,-1.765 cw(c5.703,-1.765) 6.125,-2.187 6.012,-2.3 ccw(c6.162,-2.45) J5A.3
USB_D2_P: J2.8 J5A.4 | length 71.6
  Top Layer w0.15: 2.85,54.799 ccw(c12.021,54.799) 5.533,48.317 5.537,48.313 cw(c-1.258,41.52) 8.35,41.522 8.35,41.519 8.35,39.873 cw(c5.519,39.873) 7.521,37.871 7.405,37.755 ccw(c12.486,32.674) 5.3,32.674 5.3,4.44 ccw(c7.69,4.44) 6,2.75 6.003,2.747 cw(c4.563,1.306) 6.6,1.306 6.6,-1.765 ccw(c7.197,-1.765) 6.775,-2.187 6.888,-2.3 cw(c6.738,-2.45) J5A.4 ; 2.85,54.8 2.85,57.625 cw(c3.45,57.8) 2.85,57.975 2.85,66.079 cw(c3.191,66.079) J2.8

## Polygon pours and split planes (outlines as drawn)
GND on Top Layer "GND_L01_P009" (solid, remove dead copper, pour order 9): -34.55,38.87 -34.55,30.25 cw(c-35.13,30.25) -35.13,29.67 -37.55,29.67 -40.8,29.67 cw(c-40.8,30.17) -41.3,30.17 -41.3,38.87 cw(c-40.45,38.87) -40.45,39.72 -35.4,39.72 cw(c-35.4,38.87)
1.0V on Top Layer "Top Layer-1.0V" (solid, pour order 14): -38.05,64.72 ccw(c-38.05,64.87) -37.9,64.87 -37.9,65.17 -37.2,65.17 -37.2,64.57 ccw(c-36.55,64.57) -36.55,63.92 ccw(c-36.55,64.57) -35.9,64.57 -35.9,65.17 -35.2,65.17 -35.2,64.87 ccw(c-35.05,64.87) -35.05,64.72 ccw(c-35.05,64.87) -34.9,64.87 -34.9,65.17 -34.2,65.17 -34.2,64.57 ccw(c-33.55,64.57) -33.55,63.92 -33.53,63.92 ccw(c-33.53,64.55) -32.9,64.55 cw(c-32.7,64.55) -32.624,64.735 -32.387,64.637 -32.2,64.45 ccw(c-31.547,65.103) -31.634,64.184 -31.381,63.981 -31.309,63.9 -31.155,63.805 -31.1,63.75 ccw(c-30.617,64.233) -30.617,63.55 -30.6,63.55 cw(c-30.6,63.2) -30.25,63.2 -30.25,48.679 ccw(c-27.564,48.679) -29.515,46.833 -27.245,44.434 cw(c-28.561,43.189) -26.75,43.189 -26.75,42.602 ccw(c-24.21,42.602) -26.006,40.806 -25.671,40.471 -25.6,40.3 cw(c-26,40.3) -26,39.9 -39.58,39.9 cw(c-39.58,41.07) -40.75,41.07 -40.75,47.05 -40.75,47.07 -40.75,63.62 -40.45,63.92 -39.55,63.92 ccw(c-39.55,64.57) -38.9,64.57 -38.9,65.17 -38.2,65.17 -38.2,64.87 ccw(c-38.05,64.87)
3.3V on Top Layer "Top Layer-3.3V" (solid, remove dead copper, pour order 20): -29.5,53.92 -29.5,49.066 ccw(c-26.927,49.066) -28.746,47.246 -26.654,45.154 cw(c-28.231,43.576) -26,43.576 -26,42.79 ccw(c-23.46,42.79) -23.46,40.25 -5.18,40.25 cw(c-5.18,38.74) -3.67,38.74 -3.67,31.89 ccw(c-2.85,31.89) -2.85,31.07 3.569,31.07 ccw(c3.569,31.8) 4.299,31.798 4.313,37.049 cw(c6.046,37.045) 4.82,38.27 5.817,39.267 ccw(c4.115,40.969) 6.521,41.027 6.496,42.042 ccw(c-1.124,41.8) -1.125,49.425 -10.195,49.425 ccw(c-10.196,48.871) -10.75,48.87 -10.75,44.2 cw(c-11.949,44.199) -11.95,43 -21.05,43 cw(c-21.05,44.2) -22.25,44.2 -22.25,50.8 ccw(c-22.65,50.801) -22.65,51.2 -26,51.2 cw(c-25.994,53.506) -28.3,53.506 -28.3,53.92 -28.3,63.366 -28.479,63.799 -29.1,64.42 -29.2,64.661 -29.2,65.17 -29.9,65.17 -29.9,64.332 -29.75,63.97 cw(c-30.349,63.369) -29.5,63.367
GND on Top Layer "GND_L01_P021" (solid, pour order 21): -1.055,50.345 -1.055,59.245 ccw(c-1.505,59.245) -1.505,59.695 -1.584,59.695 cw(c-1.584,60.831) -2.388,60.028 -5.899,63.539 ccw(c-6.088,63.35) -6.355,63.35 -6.355,58.045 -10.205,58.045 ccw(c-10.205,57.495) -10.755,57.495 -10.755,50.345 ccw(c-10.205,50.345) -10.205,49.795 -1.605,49.795 ccw(c-1.605,50.345)
1.15V on Top Layer "Top Layer-1.15V" (solid, pour order 13): -44.05,64.72 ccw(c-44.05,64.87) -43.9,64.87 -43.9,65.17 -43.2,65.17 -43.2,64.57 ccw(c-42.55,64.57) -42.55,63.92 -41.75,63.92 cw(c-41.75,63.67) -41.5,63.67 -41.5,59.7 -41.5,30.25 cw(c-42.05,30.25) -42.05,29.7 -52.1,29.7 ccw(c-52.1,28.65) -53.15,28.65 -53.15,10.7 cw(c-53.9,10.7) -53.9,9.95 -61.65,9.95 cw(c-61.65,11) -62.7,11 -62.7,37.25 cw(c-62.25,37.25) -62.25,37.7 -56.24,37.7 ccw(c-56.24,40.24) -53.7,40.24 -53.7,46.25 cw(c-53.25,46.25) -53.25,46.7 -49.95,46.7 ccw(c-49.95,49.4) -47.25,49.4 -47.25,59.7 -47.25,63.67 cw(c-47,63.67) -47,63.92 -46.55,63.92 ccw(c-46.55,64.57) -45.9,64.57 -45.9,65.17 -45.2,65.17 -45.2,64.87 ccw(c-45.05,64.87) -45.05,64.72 ccw(c-45.05,64.87) -44.9,64.87 -44.9,65.17 -44.2,65.17 -44.2,64.87 ccw(c-44.05,64.87)
1.8V on Top Layer "Top Layer-1.8V" (solid, pour order 15): -28.2,53.5 ccw(c-26,53.5) -26,51.3 -22.75,51.3 ccw(c-22.75,51.8) -22.25,51.8 -22.25,57.25 cw(c-21.05,57.25) -21.05,58.45 -7.3,58.45 ccw(c-7.3,59) -6.75,59 -6.75,63.45 ccw(c-7.5,63.45) -7.5,64.2 -7.65,64.2 -19.493,64.2 ccw(c-19.493,62.493) -20.7,63.7 -24.456,59.944 ccw(c-22.66,58.148) -25.2,58.148 -25.2,53.52 cw(c-26.05,53.52) -26.05,52.67 cw(c-26.05,53.47) -26.85,53.47 -26.85,61.273 -26.85,64.087 ccw(c-27.532,64.087) -27.05,64.57 -27.094,64.614 -27.2,64.87 -27.2,65.22 -27.9,65.22 -27.9,64.803 cw(c-28.583,64.803) -28.1,64.32 -28.115,64.305 -28.2,64.099 -28.2,61.273
GND on Top Layer "GND_L01_P010" (solid, pour order 10): -62.27,37.87 cw(c-62.27,38.3) -62.7,38.3 -62.7,42 cw(c-58,42) -58,46.7 -54.3,46.7 cw(c-54.3,46.25) -53.85,46.25 -53.85,40.22 cw(c-56.2,40.22) -56.2,37.87
GND on Bottom Layer "Bottom Layer-GND" (solid, remove dead copper, pour order 17): -61.65,9.95 -53.9,9.95 ccw(c-53.9,10.7) -53.15,10.7 -53.15,28.6 cw(c-52.1,28.6) -52.1,29.65 -34.5,29.65 -34.5,38.75 cw(c-33.5,38.75) -33.5,39.75 -5.4,39.75 cw(c-5.4,38.8) -4.45,38.8 -4.45,-0.089 ccw(c0.404,-0.09) -3.028,-3.522 -0.38,-6.17 ccw(c1.745,-4.044) 1.745,-7.05 2.25,-7.05 ccw(c2.25,-0.85) 8.45,-0.85 8.45,-0.266 ccw(c5.758,-0.265) 7.661,1.639 6.445,2.855 cw(c9.088,5.498) 5.35,5.498 5.35,33.05 cw(c6.15,33.05) 6.15,33.85 10.85,33.85 ccw(c10.85,34.2) 11.2,34.2 11.2,46.45 11.2,64.22 ccw(c11.072,64.22) 11.072,64.348 -0.622,64.348 ccw(c-0.622,64.17) -0.8,64.17 -0.8,60.588 cw(c-1.686,60.588) -2.312,59.962 -5.855,63.505 ccw(c-7.893,61.471) -7.894,64.35 -18.07,64.35 -19.026,64.348 ccw(c-18.916,61.611) -20.854,63.546 -24.476,59.924 ccw(c-22.731,58.177) -25.2,58.177 -25.2,53.547 -25.2,53.522 cw(c-26.071,53.521) -26.047,52.65 -26.075,52.65 cw(c-26.075,53.425) -26.85,53.4 -26.85,60.6 -26.85,62.923 -26.85,64.62 -27.15,64.92 -46.95,64.92 -47.25,64.62 -47.25,61.777 -47.25,60.6 -47.25,49.4 cw(c-49.949,49.399) -49.95,46.7 -58,46.7 ccw(c-58.001,42.001) -62.7,42 -62.7,11 ccw(c-61.65,11)

## Silkscreen, mask and mechanical layers (free items; w line width, h text height)
Top Overlay:
  text "1.8V" at -9.916,59.56 h1
  text "1.0V" at -32.666,40.91 h1
  text "3.3V" at -2.999,32.16 h1
  text "1.15V" at -59.483,23.41 h1
Top Coverlay:
  rectangle: -1.55,37.9 1.65,38.35
Measurements:
  lines w0.25: -47.55,61.88 -26.55,61.88
  text "5.0 mm vertical / from end of bend / to seating plane" at -59,64.5 h0.5
  text "90-deg bend / 2.0mm min radius" at -59,61 h0.5
  text "PSU ZIF socket" at -47.15,60.6 h1
Board Outline:
  lines w0.1: -47.55,67.8 -47.55,49.425 cw(c-49.975,49.425) -49.975,47 -58,47 ccw(c-58,42) -63,42 -63,16.07 ; -47.55,67.82 -47.3,68.07 -26.85,68.07 -26.55,67.77 ; -26.55,67.75 -26.55,53.5 ccw(c-26.05,53.5) -26.05,53 -26,53 ccw(c-26,53.5) -25.5,53.5 -25.5,54 -25.5,56.85 -25.5,58.13 cw(c-22.434,58.13) -24.602,60.298 -21.228,63.672 cw(c-19.06,61.504) -19.06,64.57 -17.78,64.57 -7.82,64.57 cw(c-7.82,61.504) -5.652,63.672 -4.3,62.32 -2.404,60.424 ccw(c-1.55,61.277) -1.55,60.07 ccw(c-1.55,60.57) -1.05,60.57 -1.05,64.57 -1.05,68.07 11.45,68.07 11.45,34.1 ; -63,16.07 ccw(c-63,16.07) -63,16.07 ; -63,16.07 -63,10.97 ccw(c-61.73,10.97) -61.73,9.7 -53.9,9.7 ccw(c-53.9,10.7) -52.9,10.7 -52.9,28.6 cw(c-52.1,28.6) -52.1,29.4 -35.05,29.4 ccw(c-35.05,30.2) -34.25,30.2 -34.25,38.7 cw(c-33.45,38.7) -33.45,39.5 -10.7,39.5 -5.5,39.5 cw(c-5.5,38.7) -4.7,38.7 -4.7,36.2 -4.7,-0.288 ccw(c0.158,-0.288) -3.277,-3.723 -1.502,-5.498 -0.598,-6.402 ccw(c1.57,-4.234) 1.57,-7.3 2.275,-7.3 ccw(c2.275,-0.875) 8.7,-0.875 8.7,-0.37 ccw(c5.634,-0.37) 7.802,1.798 6.498,3.102 cw(c8.666,5.27) 5.6,5.27 5.6,26 5.6,33.1 cw(c6.1,33.1) 6.1,33.6 10.95,33.6 ccw(c10.95,34.1) 11.45,34.1 ; 11.45,34.1 11.45,34.1 ; -21.85,44.2 ccw(c-21.05,44.2) -21.05,43.4 -11.95,43.4 ccw(c-11.95,44.2) -11.15,44.2 -11.15,57.3 ccw(c-11.95,57.3) -11.95,58.1 -21.05,58.1 ccw(c-21.05,57.3) -21.85,57.3 -21.85,44.2
Fab Notes:
  lines w0.1: -47.575,68.095 -48.125,68.645 ; -25.65,68.92 -26.3,68.27 ; -48.125,68.645 -48.125,68.645 ; -26.3,68.27 -26.3,68.27 ; -47.55,63.07 -47.55,67.82 -47.3,68.07 -26.85,68.07 -26.55,67.77 -26.55,63.07 -47.55,63.07 ; -44.5,29.75 -44.5,39.75 -34.5,39.75 -34.5,29.75 -44.5,29.75 ; -1.05,64.57 11.45,64.57 11.45,68.07 -1.05,68.07 -1.05,64.57
  text "C0.3" at -25.55,69.02 h0.5
  text "C0.3" at -49.95,68.72 h0.5
  text "Stiffener BOT / PI 0.2mm" at -26.25,65.47 h0.7
  text "Stiffener BOT / PI 0.2mm" at 11.775,65.445 h0.7
  text "TESA 8853 adhesive / applied to bottom-side coverlay" at -34.025,30.675 h0.7

## Dimensions
-34,39.75 to -34,29.75 on Fab Notes
-44.5,40.25 to -34.5,40 on Fab Notes
-1.05,68.32 to 11.45,68.32 on Fab Notes
11.7,68.07 to 11.7,64.57 on Fab Notes
-47.55,61.88 to -47.89,59.88 on Measurements
-26.55,61.88 to -26.55,53.88 on Measurements
-26.35,68.07 to -26.05,63.07 on Fab Notes
-47.5,68.32 to -26.5,68.32 on Fab Notes
-26.75,63.07 to -26.75,68.07 on Measurements
-26.75,59.88 to -26.75,63.07 on Measurements
-47.55,61.88 to -26.55,61.88 on Measurements
-58,42 to -47.55,61.88 on Measurements
-58,42 to -47.55,61.88 on Measurements